# Altium PCB AFE.PcbDoc (part 3 of 3)
Units mm, origin at the board's own origin, x right, y up, seen from the top; angles counter-clockwise.
Board outline 95 x 50 mm, 4 copper layers (Top Layer, Ground Plane, +5V Power Plane, Bottom Layer), stack 0.778 mm thick; 152 components, 132 nets, 460 pads, 163 vias.
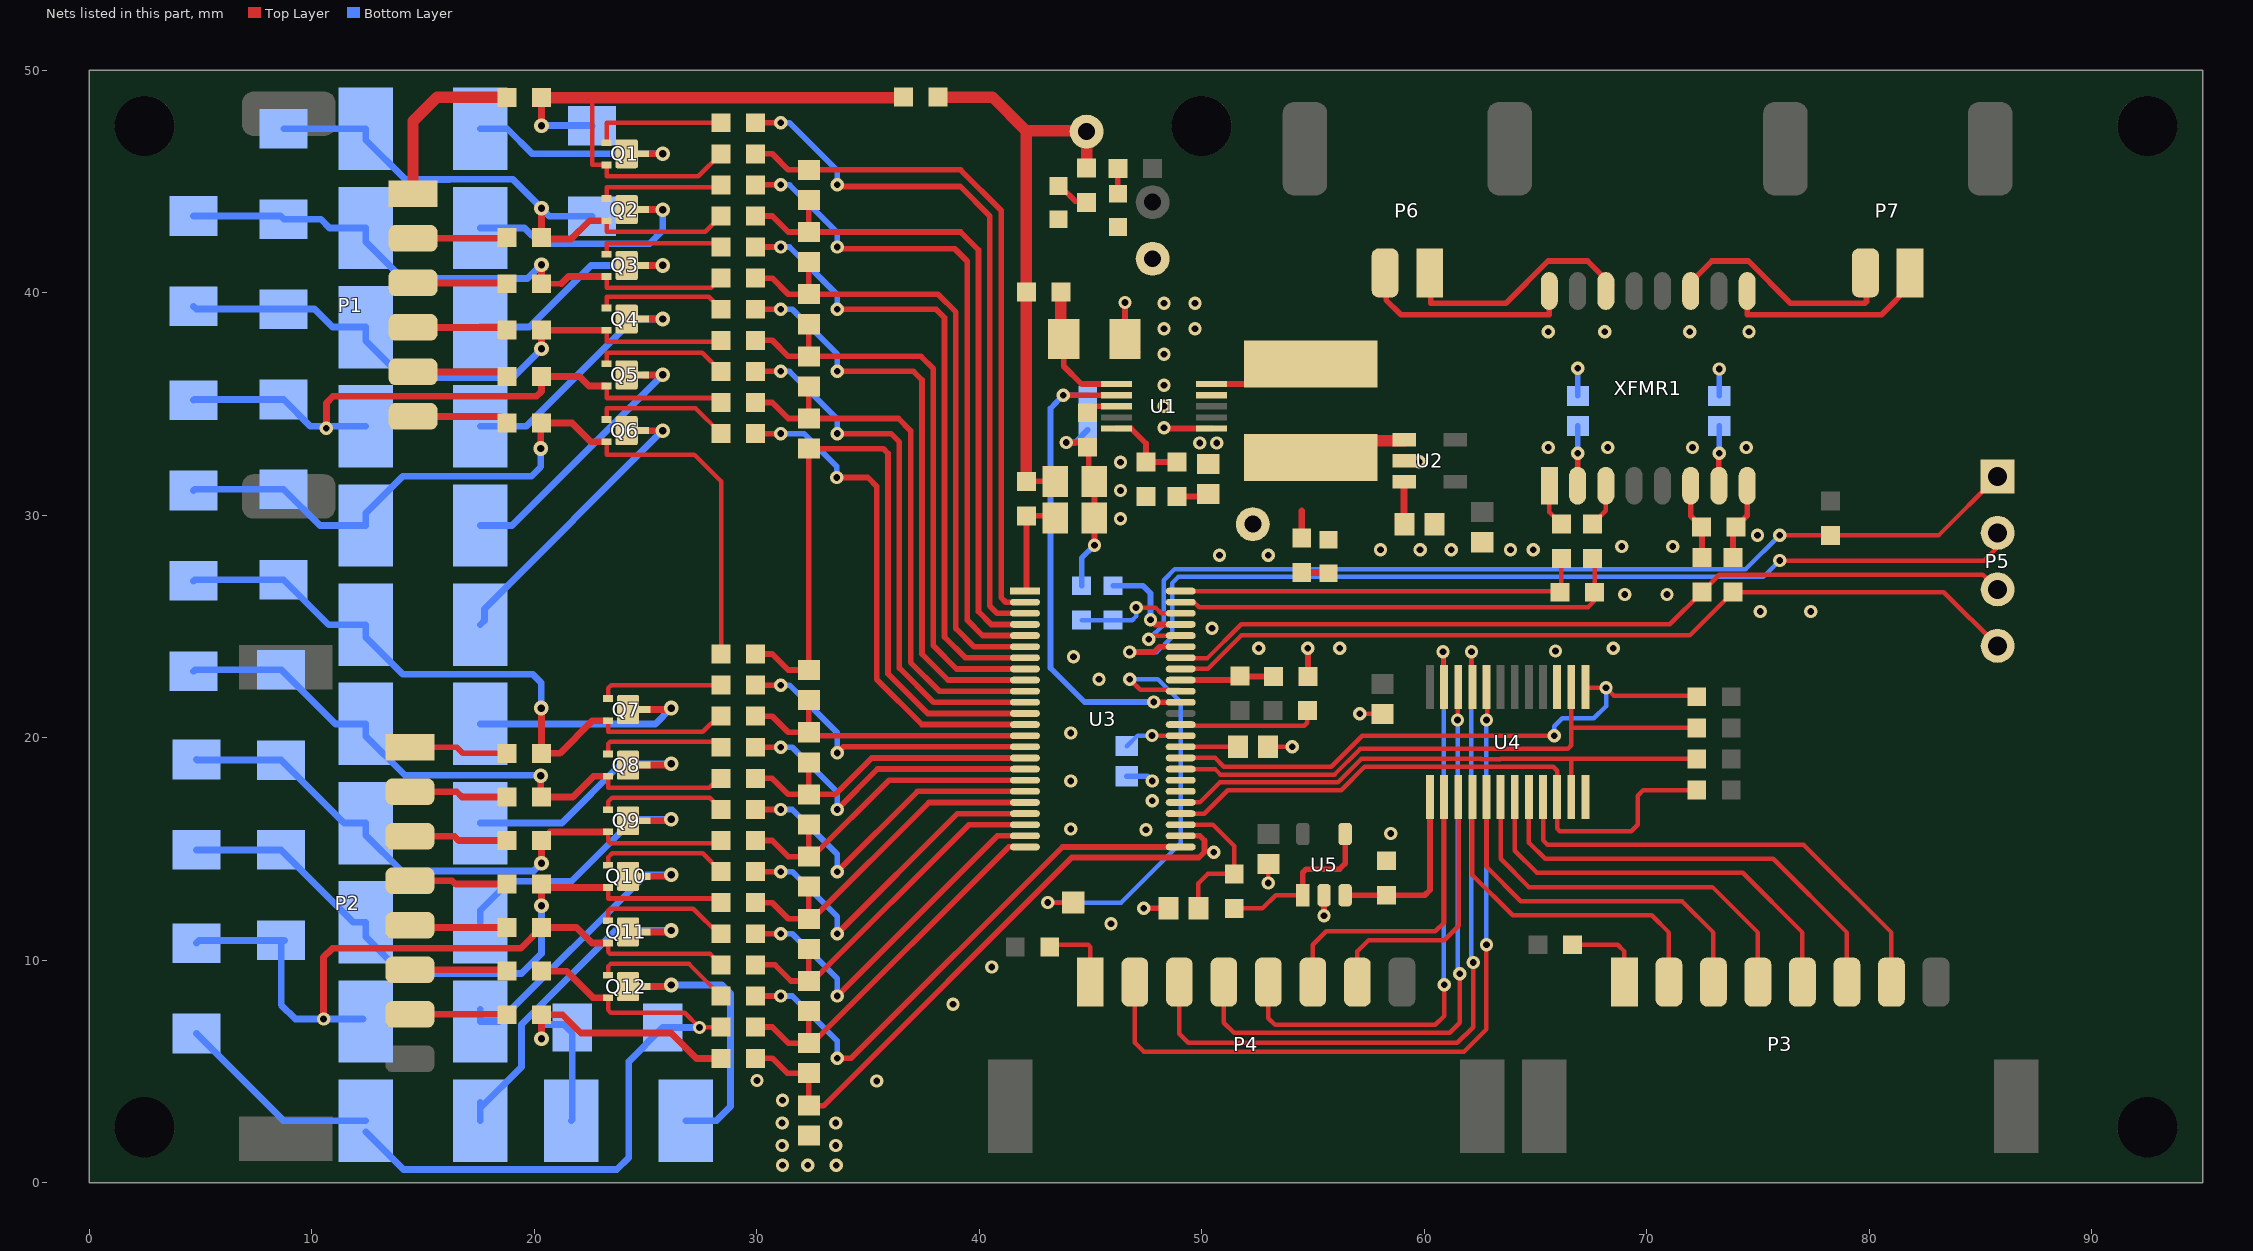
[diagram p4: the nets of this part, all layers, seen from the top]

## Via types
v1: diameter 0.6, hole 0.3, Top Layer to Bottom Layer, tented both sides, 141 vias
v2: diameter 0.66, hole 0.33, Top Layer to Bottom Layer, tented both sides, 22 vias

## Nets (pads, with @x,y where several pads share a name; then routed paths per layer and width w, separated by ;. In a path a pad name is that pad's centre, name@x,y a point inside that pad or via, vN(x,y) a via of type N, cw(c..) or ccw(c..) an arc to the next point about the centre after c; other vN are vias at no path point) (continued)
+6V: +6V.TH_TP C2.1 C3.1 L1.2 R2.1 R8.2 U2.1 U2.3 | length 8.4
  Top Layer w0.254: R8.2@48.895,30.848 C2.1@50.192,30.848
  Top Layer w0.305: R2.1@54.5,28.975 54.5,30.2 ; U2.3@59.1,31.5 59.1,29.625 C3.1@59.125,29.6
  Top Layer w0.508: L1.2@55.087,33.352 U2.1@59.1,33.352
+VTOP: +VTOP.TH_TP C21.1 R1.1 R3.1 R9.1 R30.1 | length 25.5
  Top Layer w0.254: R30.1@42.131,31.526 C21.1@43.415,31.526
  Top Layer w0.508: R9.1@38.207,48.793 40.599,48.793 42.118,47.274 ; R30.1@42.118,31.539 42.118,47.274 ; +VTOP.TH_TP@44.45,47.274 42.118,47.274 ; R1.1@44.831,45.606 +VTOP.TH_TP@44.831,47.244
A_CSB: P5.4 R29.1 U3.41 | length 39.1
  Top Layer w0.203: U3.41@49.06,23.095 50.279,23.095 51.784,24.6 71.934,24.6 R29.1@73.881,26.547 83.355,26.547 P5.4@85.772,24.13
A_SCK: P5.3 R28.1 U3.42 | length 38.5
  Top Layer w0.203: U3.42@49.087,23.568 50.244,23.568 51.776,25.1 71.037,25.1 R28.1@72.484,26.547 73.267,27.33 85.112,27.33 P5.3@85.772,26.67
A_SDI: P5.2 U3.43 | length 45.4
  Top Layer w0.203: v1(75.977,27.965) 85.165,27.965 85.772,28.572 P5.2@85.772,29.21
  Top Layer w0.254: v1(46.762,23.855) 47.871,23.855 48.111,24.095 U3.43@49.06,24.095
  Bottom Layer w0.203: v1(46.762,23.855) 47.991,23.855 48.672,24.536 48.672,26.955 48.946,27.229 75.24,27.229 v1(75.977,27.965)
A_SDO: P5.1 R31.2 U3.44 | length 43.8
  Top Layer w0.203: v1(47.631,24.435) 47.791,24.595 U3.44@49.06,24.595 ; v1(75.977,29.108) R31.2@78.25,29.108 ; R31.2@78.263,29.095 83.117,29.095 P5.1@85.772,31.75
  Bottom Layer w0.203: v1(47.631,24.435) 48.291,25.095 48.291,27.076 48.799,27.584 74.453,27.584 v1(75.977,29.108)
AFE_V+: C20.1 R30.2 U3.1 | length 4.6
  Top Layer w0.254: U3.1@42.131,26.666 R30.2@42.131,29.976 C20.1@43.415,29.976
AUX_ADC_IN_B: C24.1 R61.2 U3.27 | length 7
  Top Layer w0.203: U3.27@49.06,16.095 50.509,16.095 51.466,15.138 R61.2@51.466,13.881 50.281,13.881 49.855,13.455 C24.1@49.855,12.344 C24.1@49.929,12.344
C0: F13.1 P2.7 | length 4.2
  Top Layer w0.305: P2.7@14.56,7.575 F13.1@18.764,7.575
C0_F: D12.1 F13.2 R22.1 R52.1 | length 16.3
  Top Layer w0.305: v2(20.333,6.477) F13.2@20.333,7.556 21.273,7.556 22.098,6.731 26.162,6.731 27.305,5.588 R22.1@28.402,5.588
  Bottom Layer w0.305: v2(20.333,6.477) 20.333,6.998 20.447,7.112 21.336,7.112 D12.1@21.717,6.731 ; R52.1@21.675,2.794 21.717,2.836 D12.1@21.717,6.731 ; D12.1@21.717,6.985 D12.1@21.717,6.731
C1: F12.1 P2.6 | length 4.2
  Top Layer w0.305: P2.6@14.56,9.575 F12.1@18.783,9.575
C1_F: D11.1 D12.2 F12.2 Q12.2 R21.1 R53.1 | length 39.6
  Top Layer w0.203: Q12.2@23.324,8.323 23.324,7.776 23.452,7.648 26.769,7.648 v1(27.432,6.985) 28.385,6.985 R21.1@28.402,7.002
  Top Layer w0.305: F12.2@20.333,9.514 21.458,9.514 22.649,8.323 Q12.2@23.324,8.323
  Bottom Layer w0.305: D11.1@4.826,6.713 8.745,2.794 R53.1@12.433,2.794 ; R53.1@12.433,2.299 14.131,0.601 23.715,0.601 24.257,1.143 24.257,5.461 D12.2@25.781,6.985 v1(27.432,6.985)
C1_R: C15.2 C16.1 R21.2 U3.24 | length 17.5
  Top Layer w0.254: R21.2@29.952,7.002 30.701,7.002 31.423,6.28 C16.1@32.352,6.28 ; C15.2@32.352,7.724 C16.1@32.352,6.28 ; U3.24@42.06,15.095 41.334,15.095 32.519,6.28 C16.1@32.352,6.28
C2: F11.1 P2.5 | length 4.4
  Top Layer w0.305: P2.5@14.42,11.575 14.523,11.472 F11.1@18.783,11.472
C2_F: D10.1 D11.2 F11.2 Q11.2 R20.1 R51.1 | length 33
  Top Layer w0.203: Q11.2@23.324,10.777 23.324,10.376 23.41,10.29 27.908,10.29 R20.1@28.402,9.796
  Top Layer w0.305: v1(10.541,7.366) 10.541,10.141 10.941,10.541 19.402,10.541 F11.2@20.333,11.472 21.913,11.472 22.608,10.777 Q11.2@23.324,10.777
  Bottom Layer w0.305: D11.2@4.826,10.777 4.945,10.897 D10.1@8.636,10.897 ; D10.1@8.788,10.897 D10.1@8.636,10.897 ; R51.1@12.319,7.366 v1(10.541,7.366) 9.271,7.366 8.636,8.001 D10.1@8.636,10.897
C2_R: C14.2 C15.1 R20.2 U3.22 | length 16.8
  Top Layer w0.254: R20.2@29.952,9.796 30.828,9.796 31.55,9.074 C15.1@32.352,9.074 ; C14.2@32.352,10.518 C15.1@32.352,9.074 ; U3.22@42.06,16.095 39.54,16.095 32.519,9.074 C15.1@32.352,9.074
C3: F10.1 P2.4 | length 4.4
  Top Layer w0.305: P2.4@14.42,13.575 16.325,13.575 16.47,13.43 F10.1@18.783,13.43
C3_F: D9.1 D10.2 F10.2 Q10.2 R19.1 R50.1 | length 30.3
  Top Layer w0.203: Q10.2@23.324,13.275 23.324,12.779 R19.1@28.402,12.779
  Top Layer w0.254: F10.2@20.333,13.43 F10.2@20.488,13.275
  Top Layer w0.305: v2(20.333,12.459) F10.2@20.333,13.43 ; F10.2@20.488,13.275 Q10.2@23.324,13.275
  Bottom Layer w0.305: D9.1@4.826,14.961 D10.2@8.636,14.961 11.887,11.709 R50.1@12.433,11.709 12.433,11.062 14.097,9.398 16.223,9.398 16.232,9.407 19.44,9.407 20.333,10.3 v2(20.333,12.459)
C3_R: C13.2 C14.1 R19.2 U3.20 | length 15.8
  Top Layer w0.254: R19.2@29.952,12.59 30.701,12.59 31.423,11.868 C14.1@32.352,11.868 C13.2@32.352,13.312 ; C14.1@32.519,11.868 37.746,17.095 U3.20@42.06,17.095
C4: F9.1 P2.3 | length 4.4
  Top Layer w0.305: P2.3@14.42,15.575 16.425,15.575 16.612,15.388 F9.1@18.783,15.388
C4_F: D8.1 D9.2 F9.2 Q9.2 R18.1 R49.1 | length 27.7
  Top Layer w0.203: Q9.2@23.324,15.766 23.324,15.376 23.432,15.268 R18.1@28.402,15.268
  Top Layer w0.254: F9.2@20.333,15.388 F9.2@20.718,15.773
  Top Layer w0.305: v2(20.333,14.364) F9.2@20.333,15.388 ; F9.2@20.718,15.773 Q9.2@23.324,15.773
  Bottom Layer w0.305: D9.2@4.826,19.025 4.851,18.999 D8.1@8.636,18.999 11.468,16.167 R49.1@12.433,16.167 12.433,15.634 14.055,14.012 19.981,14.012 v2(20.333,14.364)
C4_R: C12.2 C13.1 R18.2 U3.18 | length 15.3
  Top Layer w0.254: R18.2@29.952,15.384 30.701,15.384 31.423,14.662 C13.1@32.352,14.662 ; C12.2@32.352,16.106 C13.1@32.352,14.662 ; U3.18@42.06,18.095 35.952,18.095 32.519,14.662 C13.1@32.352,14.662
C5: F8.1 P2.2 | length 4.8
  Top Layer w0.254: F8.1@18.554,17.575 F8.1@18.783,17.346
  Top Layer w0.305: P2.2@14.42,17.575 16.525,17.575 16.754,17.346 F8.1@18.783,17.346
C5_F: D7.1 D8.2 F8.2 Q8.2 R17.1 R48.1 | length 28
  Top Layer w0.203: Q8.2@23.324,18.271 23.324,17.758 27.867,17.758 R17.1@28.345,18.235
  Top Layer w0.305: v2(20.3,18.3) 20.3,17.379 F8.2@20.333,17.346 21.741,17.346 22.666,18.271 Q8.2@23.324,18.271
  Bottom Layer w0.305: D7.1@4.699,22.987 4.775,23.063 D8.2@8.636,23.063 11.074,20.625 R48.1@12.433,20.625 12.433,20.079 14.19,18.322 20.278,18.322 v2(20.3,18.3)
C5_R: C11.2 C12.1 R17.2 U3.16 | length 14.5
  Top Layer w0.254: R17.2@29.952,18.178 30.701,18.178 31.423,17.456 C12.1@32.352,17.456 ; C11.2@32.352,18.9 C12.1@32.352,17.456 ; U3.16@42.06,19.095 35.174,19.095 33.535,17.456 C12.1@32.352,17.456
C6: F7.1 P2.1 | length 4.5
  Top Layer w0.254: P2.1@14.42,19.575 16.525,19.575 16.796,19.304 F7.1@18.783,19.304
C6_F: D6.1 D7.2 F7.2 Q7.2 R16.1 R41.1 | length 30.5
  Top Layer w0.203: Q7.2@23.324,20.769 23.324,20.272 27.588,20.272 28.288,20.972 R16.1@28.402,20.972
  Top Layer w0.305: v2(20.32,21.336) 20.333,21.323 F7.2@20.333,19.304 21.159,19.304 22.624,20.769 Q7.2@23.324,20.769
  Bottom Layer w0.305: D7.2@4.699,27.051 4.75,27.102 D6.1@8.75,27.102 10.769,25.082 R41.1@12.433,25.082 12.433,24.524 14.097,22.86 19.939,22.86 20.32,22.479 v2(20.32,21.336)
C6_R: C10.2 C11.1 R16.2 U3.14 | length 13.9
  Top Layer w0.254: R16.2@29.952,20.972 30.701,20.972 31.423,20.25 C11.1@32.352,20.25 ; C10.2@32.352,21.694 C11.1@32.352,20.25 ; U3.14@42.06,20.095 32.507,20.095 C11.1@32.352,20.25
C7: F6.1 P1.6 | length 4.9
  Top Layer w0.254: F6.1@18.49,34.445 F6.1@18.783,34.152
  Top Layer w0.305: P1.6@14.028,34.445 F6.1@18.49,34.445
C7_F: D5.1 D6.2 F6.2 Q6.2 R15.1 R40.1 | length 36.9
  Top Layer w0.203: Q6.2@23.26,33.302 23.26,32.731 27.197,32.731 28.402,31.526 R15.1@28.402,23.766
  Top Layer w0.305: v2(20.3,33) 20.3,34.119 F6.2@20.333,34.152 21.712,34.152 22.562,33.302 Q6.2@23.26,33.302
  Bottom Layer w0.305: D5.1@4.699,31.115 4.75,31.166 D6.2@8.75,31.166 10.376,29.54 R40.1@12.433,29.54 12.433,30.086 14.097,31.75 19.873,31.75 20.3,32.177 v2(20.3,33)
C7_R: C9.2 C10.1 R15.2 U3.12 | length 33.1
  Top Layer w0.254: R15.2@29.952,23.766 30.701,23.766 31.423,23.044 C10.1@32.352,23.044 C9.2@32.352,32.997 35.694,32.997 35.908,32.783 35.908,22.877 37.69,21.095 U3.12@42.06,21.095
C8: F5.1 P1.5 | length 4.3
  Top Layer w0.254: F5.1@18.575,36.445 F5.1@18.783,36.237
  Top Layer w0.305: P1.5@14.56,36.445 F5.1@18.575,36.445
C8_F: D4.1 D5.2 F5.2 Q5.2 R14.1 R39.1 | length 28.8
  Top Layer w0.203: Q5.2@23.26,35.81 23.26,35.271 28.2,35.271 R14.1@28.402,35.069
  Top Layer w0.305: v1(10.668,33.909) 10.668,35.052 10.966,35.35 20.11,35.35 20.333,35.573 F5.2@20.333,36.237 22.04,36.237 22.467,35.81 Q5.2@23.26,35.81
  Bottom Layer w0.305: D5.2@4.699,35.179 4.724,35.204 D4.1@8.75,35.204 9.957,33.998 R39.1@12.433,33.998
C8_R: C8.2 C9.1 R14.2 U3.10 | length 25
  Top Layer w0.254: R14.2@29.952,35.069 30.701,35.069 31.423,34.347 C9.1@32.352,34.347 ; C8.2@32.352,35.791 C9.1@32.352,34.347 ; U3.10@42.06,22.095 38.214,22.095 36.924,23.385 36.924,33.799 36.376,34.347 C9.1@32.352,34.347
C9: F4.1 P1.4 | length 4.1
  Top Layer w0.305: P1.4@14.56,38.445 F4.1@18.62,38.445
C9_F: D3.1 D4.2 F4.2 Q4.2 R13.1 R38.1 | length 27.3
  Top Layer w0.203: Q4.2@23.26,38.318 23.26,37.788 R13.1@28.402,37.788
  Top Layer w0.305: v2(20.333,37.478) F4.2@20.333,38.318 ; F4.2@20.333,38.322 F4.2@20.333,38.318 ; Q4.2@23.26,38.318 F4.2@20.333,38.318
  Bottom Layer w0.305: D3.1@4.699,39.387 4.818,39.268 D4.2@8.75,39.268 10.135,39.268 10.947,38.456 R38.1@12.433,38.456 12.433,37.859 14.097,36.195 19.05,36.195 v2(20.333,37.478)
C9_R: C7.2 C8.1 R13.2 U3.8 | length 27
  Top Layer w0.254: R13.2@29.952,37.863 30.701,37.863 31.423,37.141 C8.1@32.352,37.141 ; C7.2@32.352,38.585 C8.1@32.352,37.141 ; U3.8@42.06,23.095 38.992,23.095 37.94,24.147 37.94,36.593 37.392,37.141 C8.1@32.352,37.141
C10: F3.1 P1.3 | length 4.2
  Top Layer w0.305: P1.3@14.56,40.445 F3.1@18.715,40.445
C10_F: D2.1 D3.2 F3.2 Q3.2 R12.1 R37.1 | length 27.2
  Top Layer w0.203: Q3.2@23.26,40.729 23.26,40.226 27.97,40.226 R12.1@28.402,40.657
  Top Layer w0.254: F3.2@20.333,40.407 21.23,40.407
  Top Layer w0.305: F3.2@20.333,40.407 v2(20.333,41.262) ; 21.23,40.407 21.552,40.729 Q3.2@23.26,40.729
  Bottom Layer w0.305: D3.2@4.699,43.451 8.606,43.451 D2.1@8.75,43.307 10.414,43.307 10.808,42.913 R37.1@12.433,42.913 12.433,42.304 14.097,40.64 19.711,40.64 v2(20.333,41.262)
C10_R: C6.2 C7.1 R12.2 U3.6 | length 28.7
  Top Layer w0.254: R12.2@29.952,40.657 30.701,40.657 31.423,39.935 C7.1@32.352,39.935 ; C6.2@32.352,41.379 C7.1@32.352,39.935 ; U3.6@42.06,24.095 39.77,24.095 38.956,24.909 38.956,39.133 38.154,39.935 C7.1@32.352,39.935
C11: F2.1 P1.2 | length 4.8
  Top Layer w0.254: P1.2@14.007,42.445 P1.2@14.56,42.445
  Top Layer w0.305: P1.2@14.56,42.445 F2.1@18.783,42.445
C11_F: D1.1 D2.2 F2.2 Q2.2 R11.1 R36.1 | length 26.3
  Top Layer w0.203: Q2.2@23.26,43.237 23.26,42.742 27.692,42.742 R11.1@28.402,43.451
  Top Layer w0.305: F2.2@20.333,42.418 21.667,42.418 22.486,43.237 Q2.2@23.26,43.237 ; F2.2@20.333,42.492 v2(20.333,43.802)
  Bottom Layer w0.305: D2.2@8.75,47.371 R36.1@12.433,47.371 12.433,46.876 14.224,45.085 16.195,45.085 16.216,45.106 19.029,45.106 v2(20.333,43.802) 20.699,43.436 D1.1@22.606,43.436
C11_R: C5.2 C6.1 R11.2 U3.4 | length 30.7
  Top Layer w0.254: R11.2@29.952,43.451 30.701,43.451 31.423,42.729 C6.1@32.352,42.729 ; C5.2@32.352,44.173 C6.1@32.352,42.729 ; U3.4@42.06,25.095 40.548,25.095 39.972,25.671 39.972,41.927 39.17,42.729 C6.1@32.352,42.729
C12: F1.1 P1.1 | length 7.9
  Top Layer w0.508: P1.1@14.56,44.445 14.56,47.707 15.646,48.793 F1.1@18.758,48.793
C12_F: D1.2 F1.2 Q1.2 R9.2 R10.1 | length 29.5
  Top Layer w0.203: 22.606,48.768 22.606,45.745 Q1.2@23.26,45.745 23.26,45.229 27.386,45.229 R10.1@28.402,46.245
  Top Layer w0.305: v2(20.333,47.511) F1.2@20.333,48.768
  Top Layer w0.508: F1.2@20.333,48.768 22.606,48.768 R9.2@36.569,48.768
  Bottom Layer w0.305: v2(20.333,47.511) 22.595,47.511 D1.2@22.606,47.5
C12_R: C5.1 R10.2 U3.2 | length 30.6
  Top Layer w0.254: R10.2@29.952,46.245 30.701,46.245 31.423,45.523 C5.1@32.352,45.523 39.17,45.523 40.988,43.705 40.988,26.306 41.199,26.095 U3.2@42.06,26.095
DRIVE: R5.1 U1.2 U3.38 | length 22.4
  Top Layer w0.254: v1(43.782,35.4) U1.2@46.167,35.4 ; v1@47.858,21.595 U3.38@49.06,21.595
  Bottom Layer w0.254: R5.1@44.882,35.4 v1(43.782,35.4) 43.211,34.803 43.211,23.139 44.743,21.607 v1(47.846,21.607)
FB: R7.1 R8.1 U1.5 | length 3.8
  Top Layer w0.254: U1.5@46.167,33.9 U1.5@46.818,33.9 ; U1.5@46.831,33.9 47.498,33.232 R7.1@47.498,32.398 R8.1@48.895,32.398
GND: C1.2 C2.2 C3.2 C4.2 C17.2 C18.2 C19.2 C20.2 C21.2 C22.2 C23.2 C24.2 C25.2 C26.2 GND.TH_TP LED1.2 LED2.2 LED3.2 R5.2 R6.2 R7.2 R25.2 R27.2 R60.2 U1.6 U1.9 U2.2 U3.30 U3.31 U4.12 U4.15 U5.2 | length 23
  Top Layer w0.203: C18.2@52.975,19.6 v1(54.075,19.6) ; v1(53,13.475) C23.2@53,14.325 ; v1(57.1,21.075) C22.2@58.125,21.075
  Top Layer w0.254: v1(43.913,33.274) 44.662,33.274 R6.2@44.878,33.058 ; C21.2@44.925,31.553 R6.2@44.925,33.024 ; C21.2@44.965,31.513 45.183,31.296 v1(45.183,28.651) ; v1(46.554,39.563) C1.2@46.554,37.914 C1.2@47.123,37.346 ; v1(47.402,12.344) C24.2@48.505,12.344 ; v1(48.307,33.934) 48.342,33.9 U1.6@50.447,33.9 ; R27.2@54.781,22.758 v1@54.781,24.015 ; v1(55.5,12) U5.2@55.5,12.925
  Bottom Layer w0.254: v1(43.913,33.274) 44.311,33.274 R5.2@44.882,33.845 ; R25.2@44.608,26.835 44.608,28.076 v1(45.183,28.651) ; C19.2@46.64,18.273 47.569,18.273 ; C25.2@66.909,35.371 v1(66.909,36.601) ; C26.2@73.259,35.371 v1(73.259,36.576)
  other v1: 31.162,0.787 32.305,0.787 33.575,0.787 31.146,1.676 33.559,1.676 31.146,2.692 33.559,2.692 31.162,3.708 35.4,4.575 30.019,4.597 38.825,8.025 40.575,9.7 45.925,11.65 58.5,15.7 47.498,15.875 44.116,15.9 47.783,17.17 44.116,18.059 47.783,18.059 44.116,20.218 45.386,22.631 44.243,23.647 65.9,23.9 52.568,24.028 54.768,24.028 56.2,24.028 68.5,24.028 50.466,24.917 75.104,25.679 77.374,25.679 69.008,26.441 70.913,26.441 50.8,28.2 53,28.2 58.039,28.448 59.817,28.448 61.214,28.448 63.881,28.448 64.897,28.448 68.881,28.6 71.167,28.6 74.977,29.108 46.355,29.845 46.355,31.115 46.355,32.385 59.784,32.402 65.579,33.045 68.246,33.045 72.056,33.045 74.469,33.045 49.911,33.249 50.673,33.249 48.307,34.9 48.307,35.839 48.307,37.236 65.579,38.252 68.119,38.252 71.929,38.252 74.596,38.252 48.307,38.379 49.704,38.379 48.307,39.522 49.704,39.522
IA_N: R29.2 R65.2 XFMR1.8 | length 3.3
  Top Layer w0.254: R29.2@73.881,28.097 R65.2@73.881,29.341 ; R65.2@74.021,29.481 74.516,29.976 XFMR1.8@74.516,31.329
IA_P: R28.2 R65.1 XFMR1.6 | length 3.4
  Top Layer w0.254: XFMR1.6@71.976,31.329 71.976,29.976 R65.1@72.471,29.481 ; R28.2@72.484,28.097 R65.1@72.484,29.468
IB_N: R62.2 R64.1 U3.47 | length 20.6
  Top Layer w0.203: U3.47@49.06,26.095 49.656,26.095 49.888,25.864 67.364,25.864 67.653,26.153 R62.2@67.653,26.543 ; R62.2@67.664,26.532 R64.1@67.664,27.954
IB_P: R62.1 R63.1 U3.48 | length 18.5
  Top Layer w0.203: U3.48@49.06,26.595 66.051,26.595 R62.1@66.103,26.543 ; R62.1@66.167,26.607 R63.1@66.167,28.054
IB_R_N: R64.2 XFMR1.3 | length 2
  Top Layer w0.203: R64.2@67.564,29.604 68.166,30.206 XFMR1.3@68.166,31.329
IB_R_P: R63.2 XFMR1.1 | length 1.9
  Top Layer w0.203: XFMR1.1@65.626,31.329 65.626,30.145 R63.2@66.167,29.604
IBIAS: R24.2 R25.1 U3.46 | length 5
  Top Layer w0.203: v1(47.054,25.854) 47.929,25.854 48.188,25.595 U3.46@49.06,25.595
  Bottom Layer w0.203: R25.1@44.608,25.285 R24.2@46.021,25.285 46.885,25.285 47.054,25.454 v1(47.054,25.854)
ICMP: R24.1 U3.45 | length 4.5
  Top Layer w0.254: v1(47.7,25.3) 47.905,25.095 U3.45@49.06,25.095
  Bottom Layer w0.254: R24.1@46.021,26.835 47.365,26.835 47.7,26.5 v1(47.7,25.3)
ISO_A_N: P7.1 XFMR1.9 | length 8.5
  Top Layer w0.254: XFMR1.9@74.516,39.571 74.516,39.014 80.549,39.014 P7.1@81.882,40.347
ISO_A_P: P7.2 XFMR1.11 | length 10.8
  Top Layer w0.254: XFMR1.11@71.976,39.571 XFMR1.11@71.976,40.079 71.976,40.093 72.171,40.289 72.171,40.67 72.929,41.427 74.571,41.427 76.476,39.522 79.803,39.522 79.882,39.601 P7.2@79.882,40.379
ISO_B_N: P6.1 XFMR1.14 | length 11.2
  Top Layer w0.254: P6.1@60.292,40.475 60.292,39.522 63.666,39.522 65.571,41.427 67.341,41.427 68.42,40.348 68.166,40.094 XFMR1.14@68.166,40.079 XFMR1.14@68.166,39.571
ISO_B_P: P6.2 XFMR1.16 | length 9.9
  Top Layer w0.254: P6.2@58.292,41.419 58.292,39.681 58.959,39.014 65.626,39.014 XFMR1.16@65.626,39.571
ISOMD: R26.1 R27.1 U3.40 | length 4
  Top Layer w0.254: U3.40@49.06,22.595 R26.1@51.544,22.595 ; R26.1@51.733,22.758 R27.1@53.231,22.758
LX: L1.1 U1.10 | length 4.5
  Top Layer w0.254: U1.10@50.447,35.9 53.7,35.9 L1.1@54.6,36.8
NetC16_2: C16.2 C17.1 R22.2 U3.26 | length 28.3
  Top Layer w0.254: R22.2@29.952,5.605 30.701,5.605 31.376,4.93 C16.2@32.352,4.93 C17.1@32.352,3.469 32.352,3.459 33,3.459 44.163,14.622 49.878,14.622 50.132,14.876 50.132,15.384 49.921,15.595 U3.26@49.06,15.595
  other v1: 50.546,14.859
NetC18_1: C18.1 U3.34 | length 2.6
  Top Layer w0.203: U3.34@49.06,19.595 C18.1@51.625,19.595
NetC19_1: C19.1 U3.35 | length 2.6
  Top Layer w0.203: v1@47.779,20.095 U3.35@49.06,20.095
  Bottom Layer w0.203: C19.1@46.64,19.623 47.12,20.103 v1(47.771,20.103)
NetC25_1: C25.1 XFMR1.2 | length 2.7
  Top Layer w0.254: XFMR1.2@66.896,31.329 v1@66.896,32.778
  Bottom Layer w0.254: v1(66.909,32.791) C25.1@66.909,34.021
NetC26_1: C26.1 XFMR1.7 | length 2.7
  Top Layer w0.254: XFMR1.7@73.246,31.329 v1@73.246,32.778
  Bottom Layer w0.254: v1(73.259,32.791) C26.1@73.259,34.021
NetF14_1: F14.1 P3.1 | length 3.8
  Top Layer w0.203: F14.1@66.675,10.7 68.7,10.7 69,10.4 P3.1@69,9.025
NetF15_1: F15.1 P4.1 | length 3.5
  Top Layer w0.203: F15.1@43.175,10.7 44.9,10.7 45,10.6 P4.1@45,9.025
  Top Layer w0.254: P4.1@44.975,9.05 P4.1@45,9.025
NetLED1_1: LED1.1 R1.2 | length 1.5
  Top Layer w0.254: LED1.1@43.571,44.754 43.685,44.754 44.32,44.119 R1.2@44.768,44.119
NetLED2_1: LED2.1 R2.2 | length 1.3
  Top Layer w0.305: R2.2@54.5,27.425 55.725,27.425 LED2.1@55.8,27.5
NetLED3_1: LED3.1 R4.2 | length 1.1
  Top Layer w0.254: LED3.1@46.238,44.449 R4.2@46.238,45.591
NetQ1_1: Q1.1 R42.2 | length 6
  Top Layer w0.203: Q1.1@23.26,46.745 23.26,47.642 R42.2@28.402,47.642
NetQ1_3: Q1.3 R36.2 | length 10.3
  Top Layer w0.254: Q1.3@24.161,46.245 Q1.3@24.911,46.245
  Top Layer w0.305: Q1.3@24.911,46.245 v2(25.781,46.245)
  Bottom Layer w0.305: R36.2@17.583,47.371 18.796,47.371 19.922,46.245 v2(25.781,46.245)
NetQ2_1: Q2.1 R43.2 | length 5.6
  Top Layer w0.203: Q2.1@23.26,44.237 23.26,44.737 R43.2@28.402,44.737
NetQ2_3: Q2.3 R37.2 | length 11.3
  Top Layer w0.254: Q2.3@24.161,43.737 Q2.3@24.911,43.737
  Top Layer w0.305: Q2.3@24.911,43.737 v2(25.781,43.737)
  Bottom Layer w0.305: R37.2@17.583,42.913 19.571,42.913 20.28,42.204 25.186,42.204 25.781,42.799 v2(25.781,43.737)
NetQ3_1: Q3.1 R44.2 | length 5.7
  Top Layer w0.203: Q3.1@23.26,41.729 23.26,42.229 28.227,42.229 R44.2@28.402,42.054
NetQ3_3: Q3.3 R38.2 | length 11
  Top Layer w0.254: Q3.3@24.161,41.229 Q3.3@24.911,41.229
  Top Layer w0.305: Q3.3@24.911,41.229 v2(25.781,41.229)
  Bottom Layer w0.305: R38.2@17.583,38.456 19.787,38.456 22.56,41.229 v2(25.781,41.229)
NetQ4_1: Q4.1 R45.2 | length 5.9
  Top Layer w0.203: Q4.1@23.26,39.318 23.26,39.818 27.844,39.818 R45.2@28.402,39.26
NetQ4_3: Q4.3 R39.2 | length 11.8
  Top Layer w0.254: Q4.3@24.16,38.818 Q4.3@24.91,38.818
  Top Layer w0.305: Q4.3@24.91,38.818 v2(25.781,38.818)
  Bottom Layer w0.305: R39.2@17.583,33.998 19.647,33.998 24.467,38.818 v2(25.781,38.818)
NetQ5_1: Q5.1 R46.2 | length 6
  Top Layer w0.203: Q5.1@23.26,36.81 23.26,37.31 27.558,37.31 R46.2@28.402,36.466
NetQ5_3: Q5.3 R40.2 | length 12.6
  Top Layer w0.254: Q5.3@24.16,36.31 Q5.3@24.91,36.31
  Top Layer w0.305: Q5.3@24.91,36.31 v2(25.781,36.31)
  Bottom Layer w0.305: R40.2@17.583,29.54 19.011,29.54 v2(25.781,36.31)
NetQ6_1: Q6.1 R47.2 | length 6.1
  Top Layer w0.203: Q6.1@23.26,34.302 23.26,34.802 27.272,34.802 R47.2@28.402,33.672
NetQ6_3: Q6.3 R41.2 | length 13.7
  Top Layer w0.254: Q6.3@24.16,33.802 Q6.3@24.91,33.802
  Top Layer w0.305: Q6.3@24.91,33.802 v2(25.781,33.802)
  Bottom Layer w0.305: R41.2@17.583,25.082 17.773,25.273 17.773,25.795 v2(25.781,33.802)
NetQ7_1: Q7.1 R54.2 | length 5.6
  Top Layer w0.203: Q7.1@23.324,21.769 23.324,22.224 23.469,22.369 R54.2@28.402,22.369
NetQ7_3: Q7.3 R48.2 | length 10.8
  Top Layer w0.305: Q7.3@24.224,21.269 Q7.3@24.974,21.269 26.095,21.269 v2(26.162,21.336)
  Bottom Layer w0.305: R48.2@17.583,20.625 25.451,20.625 v2(26.162,21.336)
NetQ8_1: Q8.1 R55.2 | length 5.7
  Top Layer w0.203: Q8.1@23.324,19.271 23.324,19.724 23.418,19.818 28.159,19.818 R55.2@28.402,19.575
NetQ8_3: Q8.3 R49.2 | length 11.7
  Top Layer w0.305: Q8.3@24.224,18.771 Q8.3@24.974,18.771 26.095,18.771 v2(26.162,18.838)
  Bottom Layer w0.305: R49.2@17.583,16.167 21.247,16.167 23.918,18.838 v2(26.162,18.838)
NetQ9_1: Q9.1 R56.2 | length 5.7
  Top Layer w0.203: Q9.1@23.324,16.773 23.324,17.124 23.504,17.304 27.893,17.304 R56.2@28.409,16.788
NetQ9_3: Q9.3 R50.2 | length 12.8
  Top Layer w0.305: Q9.3@24.224,16.273 Q9.3@24.974,16.273 26.095,16.273 v2(26.162,16.34)
  Bottom Layer w0.305: R50.2@17.583,11.709 17.583,12.249 18.889,13.555 21.683,13.555 24.468,16.34 v2(26.162,16.34)
NetQ10_1: Q10.1 R57.2 | length 5.8
  Top Layer w0.203: Q10.1@23.324,14.275 23.324,14.624 23.515,14.815 27.575,14.815 R57.2@28.402,13.987
NetQ10_3: Q10.3 R51.2 | length 13.8
  Top Layer w0.254: Q10.3@24.224,13.775 Q10.3@24.974,13.775
  Top Layer w0.305: Q10.3@24.974,13.775 25.908,13.775 25.975,13.842 v2(26.162,13.842)
  Bottom Layer w0.305: R51.2@17.583,7.804 R51.2@17.583,7.252 18.428,7.252 25.018,13.842 v2(26.162,13.842)
NetQ11_1: Q11.1 R58.2 | length 6
  Top Layer w0.203: Q11.1@23.324,11.777 23.324,12.224 23.425,12.325 27.156,12.325 R58.2@28.345,11.136
NetQ11_3: Q11.3 R53.2 | length 15.8
  Top Layer w0.254: Q11.3@24.224,11.277 Q11.3@24.974,11.277
  Top Layer w0.305: Q11.3@24.974,11.277 25.908,11.277 25.975,11.344 v2(26.162,11.344)
  Bottom Layer w0.305: R53.2@17.583,2.794 R53.2@17.583,3.359 ; R53.2@17.583,3.613 R53.2@17.583,3.359 ; v2(26.162,11.344) 23.663,11.344 19.431,7.112 19.431,5.207 R53.2@17.583,3.359
NetQ12_1: Q12.1 R59.2 | length 6.1
  Top Layer w0.203: Q12.1@23.324,9.323 23.324,9.724 23.436,9.836 26.965,9.836 R59.2@28.402,8.399
NetQ12_3: Q12.3 R52.2 | length 12.1
  Top Layer w0.254: Q12.3@24.224,8.823 Q12.3@24.974,8.823
  Top Layer w0.305: Q12.3@24.974,8.823 25.908,8.823 25.975,8.89 v2(26.162,8.89)
  Bottom Layer w0.305: v2(26.162,8.89) 28.448,8.89 28.829,8.509 28.829,3.429 28.194,2.794 R52.2@26.825,2.794
NetR6_1: R6.1 U1.3 | length 1
  Top Layer w0.254: R6.1@45.17,34.9 U1.3@46.167,34.9
NetR23_2: R23.2 U3.36 | length 6.3
  Top Layer w0.203: U3.36@49.06,20.595 49.06,20.542 54.617,20.542 54.75,20.675 R23.2@54.75,21.225
NetR61_1: R61.1 U5.1 U5.4 | length 7.7
  Top Layer w0.203: R61.1@51.466,12.331 52.731,12.331 53.325,12.925 U5.1@54.55,12.925
  Top Layer w0.254: U5.1@54.55,12.925 54.55,13.95 54.7,14.1 56.2,14.1 56.45,14.35 U5.4@56.45,15.675
REG_VIN: C1.1 R3.2 U1.1 | length 5.9
  Top Layer w0.254: C1.1@43.804,37.914 43.804,36.698 44.603,35.9 U1.1@46.167,35.9
  Top Layer w0.508: C1.1@43.668,38.05 R3.2@43.668,40.022
S1: R59.1 U3.25 | length 24.7
  Top Layer w0.254: R59.1@29.952,8.399 v1(31.082,8.399) ; v1(33.622,5.605) 34.257,5.605 43.747,15.095 U3.25@49.06,15.095
  Bottom Layer w0.254: v1(31.082,8.399) 31.606,8.399 33.622,6.383 v1(33.622,5.605)
S2: R58.1 U3.23 | length 16.7
  Top Layer w0.254: R58.1@29.952,11.193 v1(31.082,11.193) ; v1(33.622,8.399) 40.818,15.595 U3.23@42.06,15.595
  Bottom Layer w0.254: v1(31.082,11.193) 31.606,11.193 33.622,9.177 v1(33.622,8.399)
S3: R57.1 U3.21 | length 16
  Top Layer w0.254: R57.1@29.952,13.987 v1(31.082,13.987) ; v1(33.622,11.193) 39.024,16.595 U3.21@42.06,16.595
  Bottom Layer w0.254: v1(31.082,13.987) 31.606,13.987 33.622,11.971 v1(33.622,11.193)
S4: R56.1 U3.19 | length 15.2
  Top Layer w0.254: R56.1@29.952,16.781 v1(31.082,16.781) ; v1(33.622,13.987) 37.23,17.595 U3.19@42.06,17.595
  Bottom Layer w0.254: v1(31.082,16.781) 31.606,16.781 33.622,14.765 v1(33.622,13.987)
S5: R55.1 U3.17 | length 14.5
  Top Layer w0.254: R55.1@29.952,19.575 v1(31.082,19.575) ; v1(33.622,16.781) 35.436,18.595 U3.17@42.06,18.595
  Bottom Layer w0.254: v1(31.082,19.575) 31.606,19.575 33.622,17.559 v1(33.622,16.781)
S6: R54.1 U3.15 | length 14
  Top Layer w0.254: R54.1@29.952,22.369 v1(31.082,22.369) ; v1(33.622,19.321) 33.896,19.595 U3.15@42.06,19.595
  Bottom Layer w0.254: v1(31.082,22.369) 31.479,22.369 33.622,20.226 v1(33.622,19.321)
S7: R47.1 U3.13 | length 22.9
  Top Layer w0.254: R47.1@29.952,33.672 v1(31.082,33.672) ; v1(33.6,31.7) 35,31.7 35.4,31.3 35.4,22.623 37.428,20.595 U3.13@42.06,20.595
  Bottom Layer w0.254: v1(31.082,33.672) 32.128,33.672 33.6,32.2 v1(33.6,31.7)
S8: R46.1 U3.11 | length 24.6
  Top Layer w0.254: R46.1@29.952,36.466 v1(31.082,36.466) ; v1(33.622,33.672) 36.035,33.672 36.416,33.291 36.416,23.131 37.952,21.595 U3.11@42.06,21.595
  Bottom Layer w0.254: v1(31.082,36.466) 31.479,36.466 33.622,34.323 v1(33.622,33.672)
S9: R45.1 U3.9 | length 26.7
  Top Layer w0.254: R45.1@29.952,39.26 v1(31.082,39.26) ; v1(33.622,36.466) 37.051,36.466 37.432,36.085 37.432,23.766 38.603,22.595 U3.9@42.06,22.595
  Bottom Layer w0.254: v1(31.082,39.26) 31.606,39.26 33.622,37.244 v1(33.622,36.466)
S10: R44.1 U3.7 | length 28.5
  Top Layer w0.254: R44.1@29.952,42.054 v1(31.082,42.054) ; v1(33.622,39.26) 38.067,39.26 38.448,38.879 38.448,24.528 39.381,23.595 U3.7@42.06,23.595
  Bottom Layer w0.254: v1(31.082,42.054) 31.479,42.054 33.622,39.911 v1(33.622,39.26)
S11: R43.1 U3.5 | length 30.2
  Top Layer w0.254: R43.1@29.952,44.848 v1(31.082,44.848) ; v1@33.697,41.979 38.904,41.979 39.464,41.419 39.464,25.29 40.159,24.595 U3.5@42.06,24.595
  Bottom Layer w0.254: v1(31.082,44.848) 31.479,44.848 33.622,42.705 v1(33.622,42.054)
S12: R42.1 U3.3 | length 31.8
  Top Layer w0.254: R42.1@29.952,47.642 v1(31.082,47.642) ; v1@33.697,44.773 39.158,44.773 40.48,43.451 40.48,25.925 40.81,25.595 U3.3@42.06,25.595
  Bottom Layer w0.254: v1(31.082,47.642) 31.479,47.642 33.622,45.499 v1(33.622,44.848)
T0: P3.7 U4.9 | length 21.6
  Top Layer w0.203: U4.9@65.341,17.348 65.341,15.4 65.541,15.2 77.05,15.2 81,11.25 P3.7@81,9.025
T1: P3.6 U4.8 | length 20.2
  Top Layer w0.203: U4.8@64.706,17.348 64.706,15.294 65.435,14.565 75.685,14.565 79,11.25 P3.6@79,9.025
T2: P3.5 U4.7 | length 19.1
  Top Layer w0.203: U4.7@64.072,17.348 64.072,14.929 65.07,13.93 74.32,13.93 77,11.25 P3.5@77,9.025
T3: P3.4 U4.6 | length 17.9
  Top Layer w0.203: U4.6@63.436,17.348 63.436,14.563 64.705,13.295 72.955,13.295 75,11.25 P3.4@75,9.025
T4: P3.3 U4.5 | length 16.8
  Top Layer w0.203: U4.5@62.801,17.348 62.801,14.199 64.34,12.66 71.59,12.66 73,11.25 P3.3@73,9.025
T5: P3.2 U4.4 | length 15.6
  Top Layer w0.203: U4.4@62.166,17.348 62.166,13.833 63.975,12.025 70.225,12.025 71,11.25 P3.2@71,9.025
T6: P4.7 U4.3 | length 12.2
  Top Layer w0.203: P4.7@57,9.025 57,10.4 57.5,10.9 60.9,10.9 61.554,11.554 61.554,17.326 U4.3@61.531,17.348
T7: P4.6 U4.2 | length 13.6
  Top Layer w0.203: P4.6@55,9.025 55,10.7 55.6,11.3 60.5,11.3 60.896,11.696 U4.2@60.896,17.348
T8: P4.5 U4.23 | length 28.1
  Top Layer w0.203: P4.5@53,9.025 53,7.4 53.3,7.1 60.5,7.1 60.9,7.5 v1(60.9,8.9) ; v1(60.85,23.875) 60.85,22.322 U4.23@60.896,22.276 U4.23@60.9,22.272
  Bottom Layer w0.203: v1(60.85,23.875) 60.875,23.875 60.875,9.136 61.1,8.911 61.089,8.9 v1(60.9,8.9)
T9: P4.4 U4.22 | length 27.9
  Top Layer w0.203: P4.4@51,9.025 51,7.2 51.456,6.744 61.144,6.744 61.6,7.2 v1(61.6,9.4) ; v1(61.5,20.8) 61.5,22.244 U4.22@61.531,22.276
  Bottom Layer w0.203: v1(61.5,20.8) 61.5,9.5 v1(61.6,9.4)
T10: P4.3 U4.21 | length 34.5
  Top Layer w0.203: P4.3@49,9.025 49,7.824 48.998,7.822 48.998,6.702 49.406,6.294 61.494,6.294 62.2,7 v1(62.2,9.9) ; v1(62.125,23.875) 62.125,22.317 U4.21@62.166,22.276
  Bottom Layer w0.203: v1(62.125,23.875) 62.125,10.025 62.1,10 v1(62.2,9.9)
T11: P4.2 U4.20 | length 34.7
  Top Layer w0.203: P4.2@47,9.025 47,7.824 46.995,7.819 46.995,6.305 47.41,5.89 61.79,5.89 62.8,6.9 v1(62.8,10.7) ; v1(62.8,20.8) 62.825,20.825 62.825,22.252 U4.20@62.801,22.276
  Bottom Layer w0.203: v1(62.8,20.8) v1(62.8,10.7) v1(62.8,10.7) v1@62.993,10.7
T_SEL0: R35.1 U3.28 U4.10 | length 28.3
  Top Layer w0.203: U3.28@49.06,16.595 50.123,16.595 51.167,17.639 56.267,17.639 57.322,18.694 62.419,18.694 62.423,18.69 63.577,18.69 63.581,18.694 65.806,18.694 65.977,18.524 U4.10@65.977,17.348 65.977,15.923 66.1,15.8 69.3,15.8 69.6,16.1 69.6,17.4 69.853,17.653 R35.1@72.25,17.653
T_SEL1: R34.1 U3.29 U4.11 | length 25.7
  Top Layer w0.203: U3.29@49.06,17.095 49.92,17.095 50.819,17.994 56.119,17.994 57.175,19.05 62.567,19.05 62.571,19.046 63.429,19.046 63.433,19.05 66.611,19.05 ; U4.11@66.611,17.348 66.611,19.05 ; R34.1@72.25,19.05 66.611,19.05
T_SEL2: R33.1 U3.32 U4.14 | length 26.5
  Top Layer w0.203: U3.32@49.06,18.595 50.602,18.595 50.847,18.35 55.972,18.35 57.122,19.5 66.45,19.5 66.611,19.662 66.611,20.488 ; U4.14@66.6,22.287 U4.14@66.611,22.276 66.611,20.488 ; R33.1@72.25,20.447 66.653,20.447 66.611,20.488
T_SEL3: R32.1 U3.33 U4.13 | length 26.8
  Top Layer w0.203: U3.33@49.06,19.095 50.605,19.095 50.994,18.706 55.825,18.706 57.219,20.1 v1@65.775,20.1 ; v1@65.675,20.2 v1@65.775,20.1 ; v1(65.85,20.1) v1@65.775,20.1 ; U4.13@67.246,22.276 67.272,22.25 v1(68.175,22.25) 68.525,21.9 72.194,21.9 R32.1@72.25,21.844
  Bottom Layer w0.203: v1(65.85,20.1) 65.85,20.525 66.2,20.875 67.625,20.875 68.175,21.425 v1(68.175,22.25)
T_SENSE_OUT: R60.1 U4.1 U5.3 | length 8.2
  Top Layer w0.254: U5.3@56.525,13 U5.3@56.45,12.925 R60.1@58.3,12.925 60.025,12.925 60.261,13.162 U4.1@60.261,17.348
WDT: U3.39 WDT.TP | length 19.8
  Top Layer w0.203: v1(43.084,12.598) WDT.TP@44.227,12.598 ; v1(46.767,22.631) 47.237,22.161 48.994,22.161 U3.39@49.06,22.095
  Bottom Layer w0.203: v1(43.084,12.598) 46.386,12.598 49.053,15.265 49.053,21.615 48.037,22.631 v1(46.767,22.631)
pads on no net: P1.7 P2. P2.8 P3. P3.8 P4. P4.8 P6.3 P7.3 U1.4 U1.7 U1.8 U2.4 U4.16 U4.17 U4.18 U4.19 XFMR1.4 XFMR1.5 XFMR1.10 XFMR1.12 XFMR1.13 XFMR1.15

## Polygon pours and split planes (outlines as drawn)
+6V on Top Layer "+6V" (solid, pour order 0): 58.793,33.545 58.793,29.862 48.26,29.862 48.26,31.767 50.347,31.767 51.168,31.767 51.168,33.545
+5V on Top Layer "+5V" (solid, pour order 2): 60.419,35.814 60.419,29.608 63.505,29.608 63.505,35.814
GND on Top Layer "Top_GND" (solid, pour order 4): 5.306,49.725 5.306,0.331 94.7,0.331 94.7,49.725
GND on Ground Plane "Ground_Plane" (solid, pour order 6): 0.254,0.331 0.254,49.759 94.694,49.759 94.694,0.331
+5V on +5V Power Plane "+5V_Power_Plane" (solid, pour order 8): 0.254,49.759 0.254,0.331 94.694,0.331 94.694,49.759
GND on Bottom Layer "Bottom_Ground_Plane" (solid, pour order 10): 16.256,0.331 16.256,49.694 94.694,49.694 94.694,0.331

## Keep-outs
Keep-Out Layer:
  the board outline again, w0.254

## Other copper
Top Layer:
  pour cut-out: 0,21.399 0,0 29.525,0 29.525,5.025 30.529,5.025 32.021,3.841 43.24,14.884 43.24,21.4
  pour cut-out: 0,21.399 42.926,21.399 42.926,50 0,50
Bottom Layer:
  pour cut-out: 0,21.399 0,0 29.525,0 29.525,5.025 30.529,5.025 32.021,3.841 43.24,14.884 43.24,21.4
  pour cut-out: 0,21.399 42.926,21.399 42.926,50 0,50

## Silkscreen, mask and mechanical layers (free items; w line width, h text height)
Top Overlay:
  drawing of 19 lines, arcs and shapes, not listed
  text "MASTER" at 65.278,47.117 h0.8
  text "SLAVE" at 86.9,47.117 h0.8
  text "NEXT AFE" at 65.278,45.7 h0.8
  text "FROM CARRIER" at 87,44.3 h0.8
  text "C12" at 3.5,44.046 h0.8
  text "←" at 68.6,42.7 h0.8
  text "IPB" at 66.421,42.164 h0.8 r90
  text "IMB" at 67.818,42.164 h0.8 r90
  text "C11" at 3.5,42.046 h0.8
  text "C10" at 3.5,40.046 h0.8
  text "IPA" at 84.819,39.164 h0.8 r90
  text "IMA" at 86.089,39.164 h0.8 r90
  text "C9" at 3.5,38.046 h0.8
  text "C8" at 3.5,36.046 h0.8
  text "C7" at 3.5,34.046 h0.8
  text "A_SDO" at 79.422,31.242 h0.8
  text "A_SDI" at 79.422,28.702 h0.8
  text "A_SCK" at 79.422,26.162 h0.8
  text "A_CSB" at 79.422,23.622 h0.8
  text "C6" at 3.5,19.176 h0.8
  text "MSXII BMS AFE / REV 3.1" at 78.3,18.4 h0.8
  text "C5" at 3.5,17.176 h0.8
  text "C4" at 3.5,15.176 h0.8
  text "C3" at 3.5,13.176 h0.8
  text "C2" at 3.5,11.176 h0.8
  text "5V" at 44.375,10.475 h0.8
  text "T11" at 46.125,10.475 h0.8
  text "T6" at 56.425,10.475 h0.8
  text "5V" at 68.3,10.475 h0.8
  text "T5" at 70.425,10.475 h0.8
  text "T0" at 80.45,10.475 h0.8
  text "C1" at 3.5,9.176 h0.8
  text "C0" at 3.5,7.176 h0.8
  text "NC" at 3.5,5.176 h0.8
  text "T11" at 47.672,0.914 h0.8 r90
  text "T10" at 49.679,0.914 h0.8 r90
  text "T9" at 51.685,0.914 h0.8 r90
  text "T8" at 53.692,0.914 h0.8 r90
  text "T7" at 55.698,0.914 h0.8 r90
  text "T6" at 57.705,0.914 h0.8 r90
  text "T5" at 71.548,0.889 h0.8 r90
  text "T4" at 73.555,0.889 h0.8 r90
  text "T3" at 75.561,0.889 h0.8 r90
  text "T2" at 77.568,0.889 h0.8 r90
  text "T1" at 79.574,0.889 h0.8 r90
  text "T0" at 81.581,0.889 h0.8 r90
Bottom Overlay:
  text "TEMP SENSE" at 57.3,3.45 h0.8
  text "TEMP SENSE" at 81.3,3.45 h0.8
  text "T11" at 46.355,0.762 h0.8 r270
  text "T10" at 48.362,0.762 h0.8 r270
  text "T9" at 50.368,0.762 h0.8 r270
  text "T8" at 52.375,0.762 h0.8 r270
  text "T7" at 54.381,0.762 h0.8 r270
  text "T6" at 56.388,0.762 h0.8 r270
  text "T5" at 70.739,0.762 h0.8 r270
  text "T4" at 72.669,0.762 h0.8 r270
  text "T3" at 74.6,0.762 h0.8 r270
  text "T2" at 76.53,0.762 h0.8 r270
  text "T1" at 78.461,0.762 h0.8 r270
  text "T0" at 80.391,0.762 h0.8 r270